# Altium PCB 电流环打样板.PcbDoc
Units mil, origin at the board's own origin, x right, y up, seen from the top; angles counter-clockwise.
Board outline 2909.03 x 1559.03 mil, 2 copper layers (Top Layer, Bottom Layer); 25 components, 16 nets, 85 pads, 21 vias.
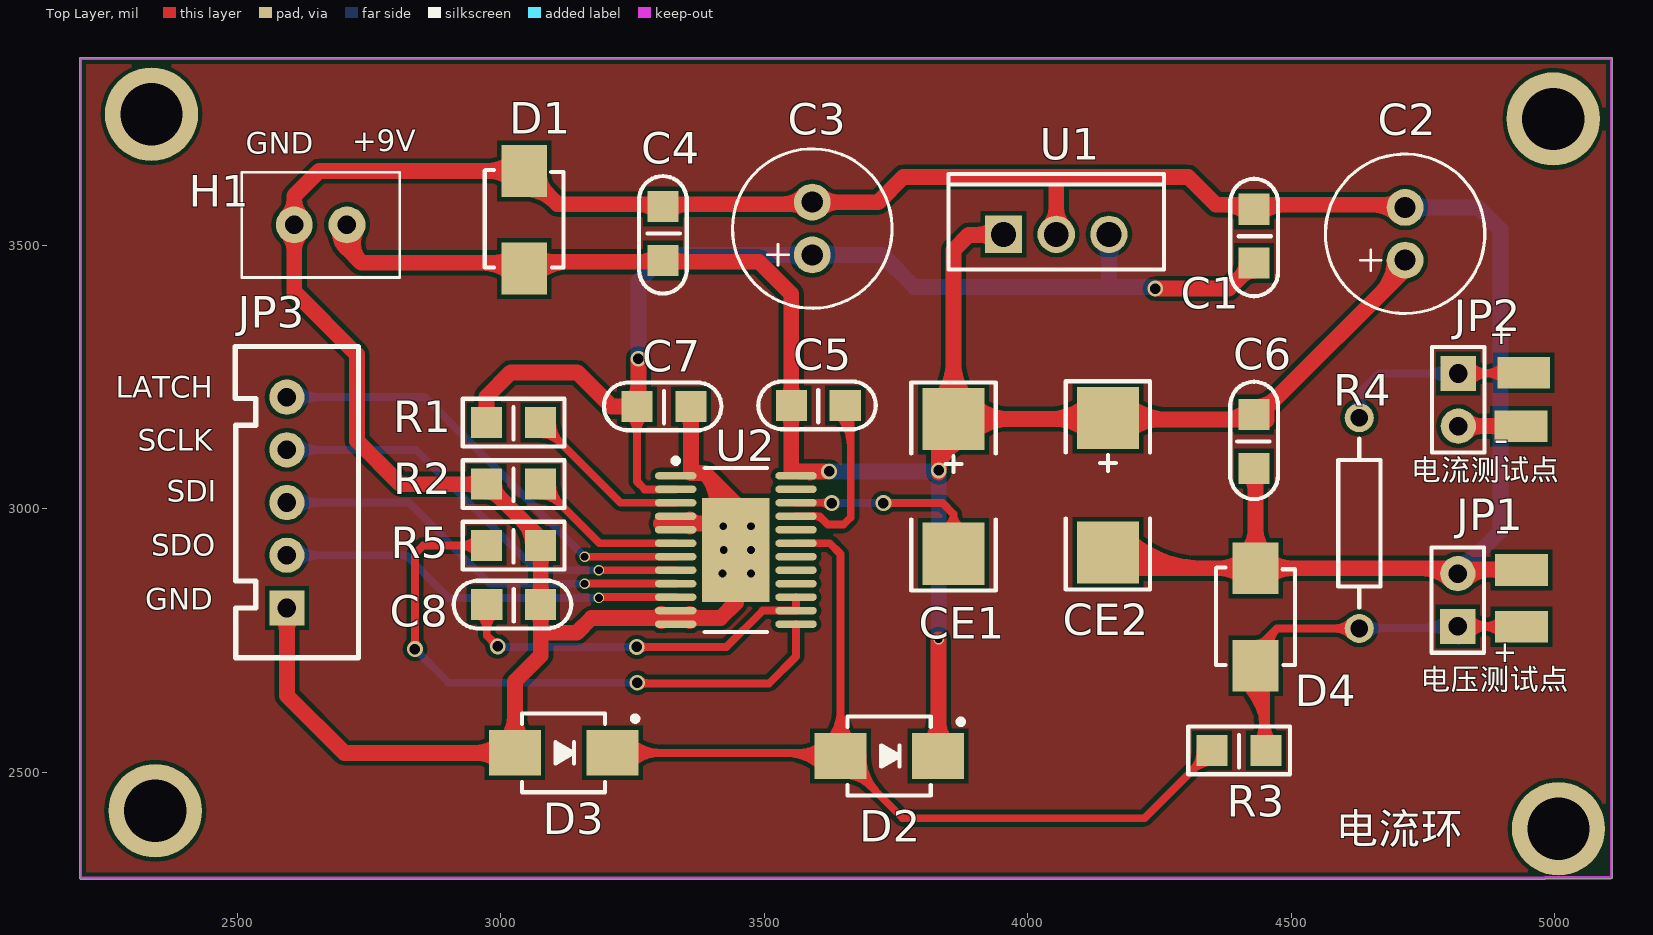
[diagram p0: Top Layer view]
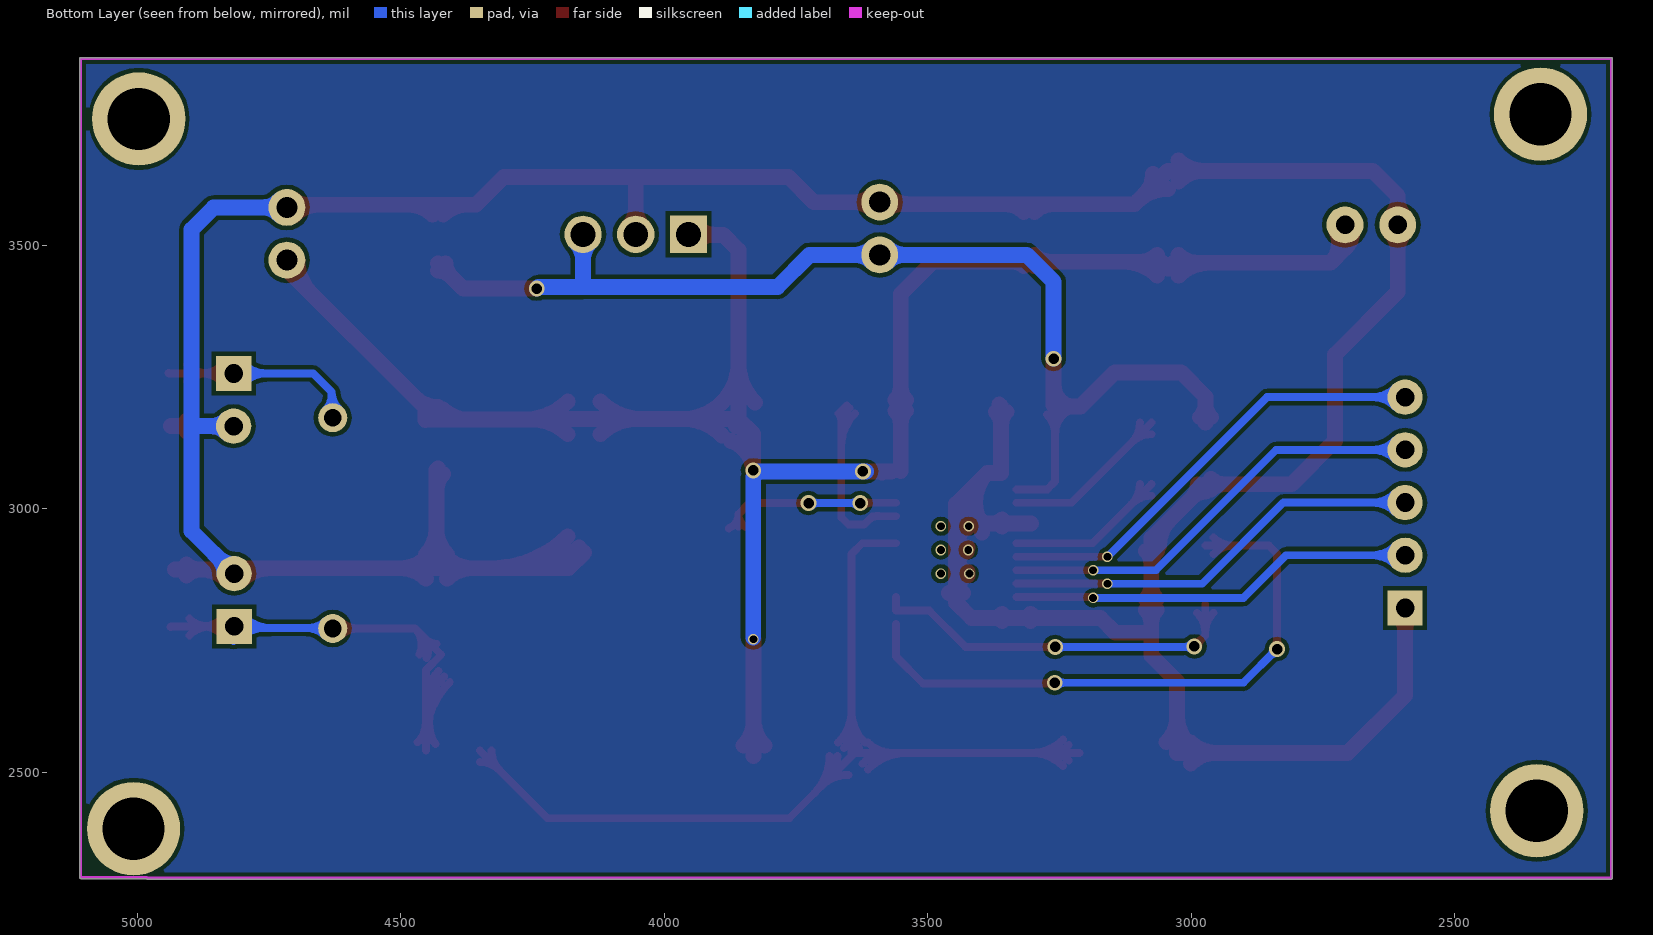
[diagram p1: Bottom Layer view, seen from below]

## Layer stack, top to bottom
Top Layer: signal copper 1.4
Dielectric: dielectric 12.6, FR-4, Dk 4.8
Bottom Layer: signal copper 1.4

## Board outline
2203,2297.49 cw(c2203,2300) 2200.49,2300 2200.49,3854 cw(c2203,3854) 2203,3856.51 5107,3856.51 cw(c5107,3854) 5109.52,3854 5109.52,2301 cw(c5107,2301) 5107,2298.49 4983.04,2298.49 4982.78,2298.22 cw(c4981,2300) 4981,2297.49

## Design rules (kind name [scope] priority, off if disabled: settings)
Clearance [All] p1: gap=8
PolygonConnect [All] p1: connectstyle=Direct reliefconductorwidth=10 reliefentries=4 polygonreliefangle="90 Angle" airgapwidth=10
RoutingVias [All] p1: holewidth=15 width=20 viastyle="Through Hole" minholewidth=5 minwidth=10 maxholewidth=20 maxwidth=30
SolderMaskExpansion [All] p1: expansion=4
Width [All] p1: maxlimit=30 minlimit=15 preferedwidth=15 minimp=50.000000 maximp=50.000000 favimp=50.000000
28 further rules are at their usual default settings.

## Components (designator, comment, footprint, x,y, rotation, side; value= is the part's Value field where it differs from the comment)
C1 "104" 0805C 4439,3517 r90 top
C2 "220UF" "220UF polar cap" 4716,3472 r90 top
C3 "220UF" "220UF polar cap" 3591,3482 r90 top
C4 "104" 0805C 3317,3522 r90 top
C5 "104" 0805C 3602,3187 r0 top
C6 "104" 0805C 4420.06,3128 r270 top
C7 "104" 0805C 3309,3185 r0 top
C8 "104" 0805C 3024,2809 r0 top
CE1 "10uF" C钽电容7mm*4mm 3859,3090 r270 top
CE2 "10uF" C钽电容7mm*4mm 4152,3092 r270 top
D1 "TVS" tvs 3047,3543 r270 top
D2 "SS38" SWB 3743,2531 r0 top
D3 "SS38" SWB 3125,2537 r0 top
D4 "TVS" tvs 4435,2789 r270 top
H1 "CH2" CH2座 2708,3539 r180 top
JP1 "HDR-1X2" HDR2.54-LI-2P 4816,2827 r90 top
JP2 "HDR-1X2" HDR2.54-LI-2P 4817,3207 r270 top
JP3 "HDR-1X5" XH2.54-LI-5P 2594,3012 r90 top
R1 "10K" 0805R 3024,3159 r0 top
R2 "1K" 0805R 3024,3042.33 r0 top
R3 "20" 0805R 4401,2537 r0 top
R4 "Res2" AXIAL-0.4 4629,2973 r90 top
R5 "15K" 0805R 3024,2925.67 r0 top
U1 "L7805CP" ISOWATT220AB 4054,3521 r0 top
U2 "AD5410" AD5410 3446,2922 r0 top

## Footprints (in the part's own frame and the unit in brackets; to place one, negate y for a bottom-side part, rotate by r counter-clockwise, add the part's x,y. Pads: shape width x height; smd on the part's side, far side on the other; paste and mask are expansions set on the pad)
"220UF polar cap" [mil]
  round 70 hole 40: 1(0,0) 2(100,0)
  silkscreen extent -101,-151 201,151
0805C [mm]
  rect 1.5x1.5 smd: 1(-1.289,0.241) 2(1.311,0.241)
  silkscreen extent -2.88,-0.91 2.78,1.39
0805R [mm]
  rect 1.5x1.5 smd: 1(-1.299,0.116) 2(1.301,0.116)
  silkscreen extent -2.45,-1.03 2.45,1.27
AD5410 [mm]
  oval 2x0.35 smd: 1(-2.9,3.575) 2(-2.9,2.925) 3(-2.9,2.275) 4(-2.9,1.625) 5(-2.9,0.975) 6(-2.9,0.325) 7(-2.9,-0.325) 8(-2.9,-0.975) 9(-2.9,-1.625) 10(-2.9,-2.275) 11(-2.9,-2.925) 12(-2.9,-3.575) 13(2.9,-3.575) 14(2.9,-2.925) 15(2.9,-2.275) 16(2.9,-1.625) 17(2.9,-0.975) 18(2.9,-0.325) 19(2.9,0.325) 20(2.9,0.975) 21(2.9,1.625) 22(2.9,2.275) 23(2.9,2.925) 24(2.9,3.575)
  rect 3.25x5.02 smd: 25(0,0)
  silkscreen extent -3.02,-3.95 1.5,4.42, body extent -2.25,-3.95 2.25,3.95, height 1.2
AXIAL-0.4 [mm] "Axial Device, Thru-Hole; 2 Leads; 0.4 in Pin Spacing"
  round 1.4 hole 0.85: 1(-5.08,0) 2(5.08,0)
  silkscreen extent -4.06,-1.02 4.06,1.02
CH2座 [mil]
  round 70 hole 35: 1(0,0) 2(100,0)
  silkscreen extent -100,-100 200,100
C钽电容7mm*4mm [mm] "E106钽电容"
  rect 3x3 smd: 1(-2.048,0) 2(4.445,0)
  silkscreen extent -3.81,-2.03 6.22,2.03
HDR2.54-LI-2P [mm] "封装库来自淘宝卖家 ID：黄晶宝石"
  rect 1.7x1.7 hole 0.9: 1(-1.27,0)
  round 1.7 hole 0.9: 2(1.27,0)
  silkscreen extent -2.54,-1.27 2.54,1.27, body extent -2.54,-1.27 2.54,1.27, height 8.5
ISOWATT220AB [mm] "TO, Thru-Hole, Vertical, Heatsink Mounted; 3 In-Line Leads; Pitch 2.54 mm; Pin sequence 1, 3, 2"
  rect 1.8x1.8 hole 1.2: 1(-2.54,0)
  round 1.8 hole 1.2: 2(2.54,0) 3(0,0)
  silkscreen extent -5.2,-1.7 5.2,2.9
SWB [mm] "7.2*3.8*2.2mm(长宽高，不包括引脚）"
  rect 2.5x2.2 smd: 1(-2.5,0) 2(2.2,0)
  silkscreen extent -2.16,-1.9 3.43,1.9, body extent -2.78,-1.8 2.52,1.8, height 2.35
tvs [mm] "4*3.0*2.2mm(长宽高，不包括引脚）"
  rect 2.5x2.2 smd: 1(-2.5,-0.071) 2(2.2,-0.071)
  silkscreen extent -2.54,-1.97 2.16,1.83
XH2.54-LI-5P [mm] "接插件，5P  淘宝ID:黄晶宝石   店铺网址:https://shop463601444.taobao.com"
  rect 1.7x1.7 hole 0.9: 1(-5.08,0)
  round 1.7 hole 0.9: 2(-2.54,0) 3(0,0) 4(2.54,0) 5(5.08,0)
  silkscreen extent -7.48,-3.45 7.52,2.49, body extent -7.58,-3.3 7.58,2.4, height 7.03

## Part data
C1 C4 C5 C6 C7 C8: library part cap, "非极性电容"
C2 C3: library part "220UF polar cap", "220UF polar cap"
CE1 CE2: library part CE, "直插电解电容"
D1 D4: library part SMAJ26CA, "瞬态抑制二极管(TVS)"
D2 D3: library part SS34, "肖特基二极管"
H1: library part CH2座, "CH2座"
JP1 JP2: library part "Header 2", "2P接插件"
JP3: library part "Header 5", "5P接插件"
R1 R2 R3 R5: library part 0805电阻, "0805电阻"
R4: "Resistor"
U1: "Positive Voltage Regulator"
U2: "电流环芯片"

## Free pads (board coordinates)
  rect 100x60 smd paste+0 mask+4: 0(4936,3157) 0(4941,3258) 1(4937,2884) 2(4937,2776)
  round 177.17 hole 118.11 paste+0 mask+4: 0(4997,3740) 1(2344,2427) 2(2337,3749) 3(5007,2393)

## Via types
v1: diameter 20, hole 15, Top Layer to Bottom Layer, 11 vias
v2: diameter 30, hole 20, Top Layer to Bottom Layer, 10 vias

## Nets (pads, with @x,y where several pads share a name; then routed paths per layer and width w, separated by ;. In a path a pad name is that pad's centre, name@x,y a point inside that pad or via, vN(x,y) a via of type N, cw(c..) or ccw(c..) an arc to the next point about the centre after c; other vN are vias at no path point)
+5V: C1.1 C3.1 C7.1 R1.1 U1.2 U2.2 | length 2689.6
  Top Layer w15: C7.1@3242.67,3178.89 cw(c3205.07,3141.29) 3258.25,3141.29 cw(c3311.43,3141.29) C7.1@3273.82,3178.89 ; C7.1 3258.25,3051.75 3272.84,3037.16 U2.2
  Top Layer w30: R1.1@2962.59,3173.85 ccw(c2937.79,3198.65) 2972.86,3198.65 ccw(c3007.93,3198.65) R1.1@2983.13,3173.85 ; R1.1 2972.86,3212.86 3019,3259 3145,3259 3209.53,3194.47 C7.1 3261,3197.22 v2(3261,3285) ; C7.1@3247.98,3184.2 ccw(c3223.18,3159.4) 3223.18,3194.47 ccw(c3223.18,3229.54) 3247.98,3204.74 ccw(c3216.53,3236.19) 3261,3236.19 ; v2(4242,3418) 4381.28,3418 C1.1 ; C1.1@4415,3466.25 cw(c4379.93,3466.25) 4404.73,3441.45 cw(c4429.53,3416.65) C1.1@4429.53,3451.72
  Bottom Layer w30: v2(3261,3285) 3261,3431 3312,3482 3724,3482 3785,3421 4154,3421 ; C3.1@3576.86,3467.86 ccw(c3542.72,3433.72) 3542.72,3482 ccw(c3542.72,3530.28) C3.1@3576.86,3496.14 ; C3.1@3605.14,3467.86 cw(c3639.28,3433.72) 3639.28,3482 cw(c3639.28,3530.28) C3.1@3605.14,3496.14 ; U1.2@4139.55,3506.55 cw(c4104.67,3471.67) 4154,3471.67 cw(c4203.33,3471.67) U1.2@4168.45,3506.55 ; U1.2 4154,3421 ; v2(4242,3418) 4239,3421 4154,3421
+9V: C2.1 C4.1 C5.1 C6.1 CE1.1 CE2.1 D1.2 D2.2 H1.1 U1.1 U2.24 | length 5417.8
  Top Layer w30: H1.1@2694.6,3524.15 cw(c2667.38,3494) 2708,3494 ; H1.1@2699.17,3543.7 ccw(c2735.21,3524.52) 2706.34,3495.66 ; H1.1 2708,3494 ; H1.1@2721.4,3524.15 ccw(c2748.62,3494) 2708,3494 ; H1.1@2725.66,3529.6 ccw(c2772.61,3504.61) 2735,3467 ; 2964.47,3467 cw(c2964.47,3382.56) D1.2@3024.18,3442.27 ; 2987.24,3467 ccw(c2987.24,3519.24) D1.2@3024.18,3482.3 ; D1.2@3064.21,3442.27 cw(c3128.75,3377.73) 3128.75,3469 ; D1.2@3064.21,3482.3 ccw(c3096.32,3514.41) 3096.32,3469 ; 3267.03,3469 ccw(c3267.03,3511.75) C4.1@3297.26,3481.52 ; 3277.88,3469 cw(c3277.88,3441.6) C4.1@3297.26,3460.98 ; C4.1@3317.8,3460.98 cw(c3337.18,3441.6) 3337.18,3469 ; C4.1@3317.8,3481.52 ccw(c3348.03,3511.75) 3348.03,3469 ; C5.1@3540.98,3186.2 cw(c3516.18,3161.4) 3551.25,3161.4 cw(c3586.32,3161.4) C5.1@3561.52,3186.2 ; C5.1@3540.98,3206.74 ccw(c3516.18,3231.54) 3551.25,3231.54 ccw(c3586.32,3231.54) C5.1@3561.52,3206.74 ; 3551.25,3071.67 C5.1 3551.25,3407.75 3490,3469 3056.82,3469 D1.2 3033.57,3467 2735,3467 ; 3568.43,3071 v2@3613,3071 ; D2.2@3809.6,2551.02 ccw(c3758.87,2601.75) 3830.62,2601.75 ; CE1.1@3827.85,3201.78 ccw(c3752.64,3276.99) 3859,3276.99 ccw(c3965.36,3276.99) 3890.15,3201.78 ccw(c3965.36,3276.99) 3965.36,3170.63 ccw(c3965.36,3064.27) CE1.1@3890.15,3139.48 ; D2.2@3830.62,2531 v1(3830.62,2752.62) ; 3830.62,2596.93 ccw(c3895.55,2596.93) D2.2@3849.64,2551.02 ; v2@3831,3069.07 cw(c3894.55,3069.07) CE1.1@3873.56,3129.04 ; v2(3831,3073) 3831,3142.62 CE1.1 ; 3831,3111.35 cw(c3879.75,3111.35) CE1.1@3863.65,3157.36 ; 3902.26,3520 ccw(c3902.26,3572.74) U1.1@3939.55,3535.45 ; 3907.08,3520 cw(c3907.08,3474.08) U1.1@3939.55,3506.55 ; U1.1@3954,3520 3888,3520 3859,3491 CE1.1 ; 4040.82,3170.63 ccw(c4040.82,3283.81) CE2.1@4120.85,3203.78 ; 4050.47,3170.63 cw(c4050.47,3071.1) CE2.1@4120.85,3141.48 ; CE2.1@4183.15,3141.48 cw(c4251.12,3073.51) 4251.12,3169.63 ; CE2.1@4183.15,3203.78 ccw(c4265.6,3286.23) 4265.6,3169.63 ; 4372.43,3169.63 ccw(c4372.43,3235.85) C6.1@4419.26,3189.02 ; C6.1@4429.53,3193.28 ccw(c4429.53,3253.03) 4471.78,3210.78 ; 4669.84,3408.84 ccw(c4606.67,3472) C2.1@4696,3472 ; C2.1 4716,3455 4453.47,3192.47 4453.47,3168.75 4452.59,3169.63 4192,3169.63 4191,3170.63 CE1.1 ; C2.1@4718,3472 C2.1@4718,3489 ; 2708,3494 2735,3467 ; U2.24@3586.92,3068.48 cw(c3593,3062.41) 3593,3071 ccw(c3593,3062.41) U2.24@3586.92,3068.48
  Bottom Layer w30: v2@3617,3071 v2(3623,3071) 3821,3071 3831,3061 v1@3831,2756
GND: C1.2 C2.2 C3.2 C4.2 C6.2 C7.2 C8.2 CE2.2 D1.1 D3.1 D4.1 H1.2 JP1.2 JP2.2 JP3.1 pad.0@4936,3157 pad.1@4937,2884 R2.1 R5.2 U1.3 U2.1 U2.4 U2.5 U2.11 U2.12 U2.25 | length 10768.8
  Top Layer w30: JP3.1@2580.94,2798.94 cw(c2549.42,2767.42) 2594,2767.42 cw(c2638.58,2767.42) JP3.1@2607.06,2798.94 ; H1.2@2593.86,3524.86 cw(c2559.72,3490.72) 2608,3490.72 cw(c2656.28,3490.72) H1.2@2622.14,3524.86 ; H1.2@2593.86,3553.14 ccw(c2559.72,3587.28) 2608,3587.28 ccw(c2656.28,3587.28) H1.2@2622.14,3553.14 ; JP3.1 2594,2646 2703,2537 D3.1 3026.58,2672.58 3075.61,2721.61 3075.61,2765 ; R2.1@2962.59,3036.64 ccw(c2937.79,3011.84) 2937.79,3046.91 ccw(c2937.79,3081.98) R2.1@2962.59,3057.18 ; R2.1@2972.86,3032.38 cw(c2972.86,2997.31) 2997.66,3022.11 cw(c3022.46,3046.91) R2.1@2987.39,3046.91 ; D3.1@3000.66,2516.98 ccw(c2952.34,2468.66) 2952.34,2537 ccw(c2952.34,2605.34) D3.1@3000.66,2557.02 ; D3.1@3006.56,2557.02 ccw(c2958.24,2605.34) 3026.58,2605.34 ccw(c3094.92,2605.34) D3.1@3046.6,2557.02 ; D1.1@3024.18,3621.4 ccw(c2975.86,3573.08) 2975.86,3641.42 ccw(c2975.86,3709.76) D1.1@3024.18,3661.44 ; 3040.31,2979.46 cw(c2991.09,2930.24) R5.2@3060.7,2930.24 ; D1.1@3044.19,3607.21 cw(c3044.19,3524.61) 3102.6,3583.01 ; R5.2@3064.95,2919.97 cw(c3039.22,2894.24) 3075.61,2894.24 ; C8.2@3065.34,2808.2 cw(c3040.54,2783.4) 3075.61,2783.4 cw(c3110.68,2783.4) C8.2@3085.88,2808.2 ; C8.2@3065.34,2828.74 ccw(c3040.54,2853.54) 3075.61,2853.54 ccw(c3110.68,2853.54) C8.2@3085.88,2828.74 ; D1.1@3072.5,3635.51 ccw(c3126.58,3635.51) 3088.34,3597.27 ; 3075.61,2896.1 cw(c3109.36,2896.1) R5.2@3085.5,2919.97 ; 3261.86,3578 cw(c3261.86,3527.94) C4.2@3297.26,3563.34 ; 3285.51,2793 ccw(c3285.51,2820.68) U2.11@3305.08,2801.11 ; 3290.56,2793 cw(c3290.56,2772.47) U2.12@3305.08,2786.99 ; 3304,2972 3380,2972 ; C4.2@3317.8,3563.34 cw(c3353.2,3527.94) 3353.2,3578 ; C7.2@3350.34,3184.2 cw(c3325.54,3159.4) 3360.61,3159.4 cw(c3395.68,3159.4) C7.2@3370.88,3184.2 ; U2.12@3358.57,2786.99 cw(c3373.09,2772.47) 3373.09,2793 ; U2.11@3358.57,2801.11 ccw(c3378.15,2820.68) 3378.15,2793 ; U2.5@3358.57,2966.12 cw(c3372.77,2951.93) 3372.77,2972 ; U2.4@3358.57,2980.24 ccw(c3378.47,3000.14) 3378.47,2972 ; C7.2@3364,3197.86 C7.2 3360.61,3068 3387,3068 ; U2.25@3397.04,2955.44 ccw(c3380,2954.95) 3380,2972 ; U2.25@3401.99,2978.33 ccw(c3331.67,3012.66) 3387,3068 ; U2.25@3406.25,2985.45 cw(c3380,3004.33) 3380,2972 ; 3416.73,3038.27 cw(c3371.62,2993.16) U2.25@3428.95,2965.17 ; U2.25@3424.2,2926.85 cw(c3417.31,2899) U2.25@3446,2899 ; U2.25@3424.35,2873.29 ccw(c3380.38,2922) U2.25 ; U2.25@3424.54,2880.54 cw(c3372.72,2828.72) U2.25@3446,2828.72 ; U2.25@3425.3,2963.24 ccw(c3385.08,3009) U2.25@3446,3009 ; U2.25@3425.54,2970.54 cw(c3376.13,2921.13) U2.25@3446,2921.13 ; U2.25@3426.54,2918.46 ccw(c3379.54,2965.46) U2.25@3446,2965.46 ; U2.25@3426.54,2925.54 cw(c3379.54,2878.54) U2.25@3446,2878.54 ; U2.25@3432.39,2840.11 cw(c3427.15,2822) 3446,2822 ; U2.25@3459.61,2840.11 ccw(c3464.85,2822) 3446,2822 ; 3533.06,3578 ccw(c3533.06,3639.94) C3.2@3576.86,3596.14 ; 3552.37,3578 cw(c3552.37,3543.37) C3.2@3576.86,3567.86 ; C3.2 3716,3582 3764,3630 4054,3630 ; C3.2@3595,3568 3585,3578 3107.61,3578 D1.1 2655.42,3641.42 2608,3594 H1.2 2608,3411.77 2727,3292.77 2727,3129 2809.09,3046.91 R2.1 3075.22,2944.55 R5.2 3075.61,2929.86 C8.2 3075.61,2765 ; C3.2@3605.14,3567.86 cw(c3639.28,3533.72) 3639.28,3582 cw(c3639.28,3630.28) C3.2@3605.14,3596.14 ; U1.3@4039.55,3535.45 ccw(c4004.67,3570.33) 4054,3570.33 ccw(c4103.33,3570.33) U1.3@4068.45,3535.45 ; U1.3 4054,3630 ; CE2.2 4181.58,2887.42 D4.1 ; CE2.2@4161.94,2926.94 ccw(c4257.35,3022.35) 4257.35,2887.42 ; CE2.2@4183.15,2948.15 ccw(c4329.77,3094.77) 4329.77,2887.42 ; 4374.2,3577 cw(c4374.2,3513.28) C1.2@4419.26,3558.34 ; D4.1@4412.18,2867.4 ccw(c4363.86,2819.08) 4363.86,2887.42 ccw(c4363.86,2955.76) D4.1@4412.18,2907.44 ; D4.1@4412.18,2913.34 ccw(c4363.86,2961.66) 4432.19,2961.66 ccw(c4500.53,2961.66) D4.1@4452.21,2913.34 ; C6.2@4419.26,3066.12 cw(c4388.02,3034.88) 4432.19,3034.88 ; C6.2 4432.19,3073.73 D4.1 ; C1.2@4439.8,3558.34 cw(c4484.86,3513.28) 4484.86,3577 ; D4.1@4452.21,2867.4 cw(c4500.53,2819.08) 4500.53,2887.42 cw(c4500.53,2955.76) D4.1@4452.21,2907.44 ; D4.1@4453.47,2896.69 D4.1@4444.19,2887.42 ; 4655.64,3577 cw(c4655.64,3511.64) C2.2@4701.86,3557.86 ; 4679.79,3577 ccw(c4679.79,3608.21) C2.2@4701.86,3586.14 ; C2.2@4718,3589 4706,3577 4357,3577 4304,3630 4054,3630 ; 4746.27,2887.42 cw(c4746.27,2807.27) JP1.2@4802.94,2863.94 ; JP2.2 pad.0@4936,3157 ; JP1.2@4829.06,2863.94 cw(c4879.89,2813.11) 4879.89,2885 ; JP2.2@4830.06,3143.94 cw(c4861.58,3112.42) 4861.58,3157 cw(c4861.58,3201.58) JP2.2@4830.06,3170.06 ; 4878.37,2885 cw(c4878.37,2845.37) pad.1@4906.39,2873.39 ; 4883.2,2885 ccw(c4883.2,2917.8) pad.1@4906.39,2894.61 ; pad.0@4905.39,3146.39 ccw(c4879.79,3120.79) 4879.79,3157 ccw(c4879.79,3193.21) pad.0@4905.39,3167.61 ; pad.1@4929,2885 4815,2885 4805.58,2887.42 D4.1@4444.19,2887.42 ; 3075.61,2765 3144,2765 3172,2793 3417,2793 3446,2822 ; 3387,3068 U2.25@3446,3009 ; 3446,2822 U2.25 ; U2.25 U2.25@3446,3009 ; D4.1 D4.1@4444.19,2887.42
  Bottom Layer w30: C3.2 3609,3582 C3.2@3595,3568 ; C2.2 4855,3572 4897,3530 4897,3167 ; C2.2@4730.14,3557.86 cw(c4764.28,3523.72) 4764.28,3572 cw(c4764.28,3620.28) C2.2@4730.14,3586.14 ; JP1.2 4897,2958 4897,3167 ; JP1.2@4816,2895.46 ccw(c4816,2940.04) 4847.52,2908.52 ccw(c4879.04,2877) JP1.2@4834.46,2877 ; JP2.2 4887,3157 4897,3167 ; JP2.2@4830.06,3143.94 cw(c4861.58,3112.42) 4861.58,3157 cw(c4861.58,3201.58) JP2.2@4830.06,3170.06
  other v1: 3421,2877 3475,2877 3423,2922 3475,2922 3422,2967 3475,2967
NetC5_2: C5.2 U2.21 | length 480
  Top Layer w15: U2.21 3605.02,2985.98 3621,2970 3650,2970 3664,2984 3664,3186.08 C5.2 ; U2.21@3592.65,2986.59 cw(c3592.65,2958.2) 3612.73,2978.27 ; C5.2@3638.03,3180.89 cw(c3575.35,3118.21) 3664,3118.21 ; C5.2@3648.64,3191.5 cw(c3611.56,3154.42) 3664,3154.42 ; C5.2@3664,3168.37 cw(c3681.71,3168.37) C5.2@3669.19,3180.89
NetC8_1: C8.1 U2.14 U2.15 | length 906.1
  Top Layer w15: C8.1@2957.67,2802.89 cw(c2920.07,2765.29) 2973.25,2765.29 cw(c3026.43,2765.29) C8.1@2988.82,2802.89 ; C8.1 2973.25,2759.75 v2(2994,2739) ; v2@2986.5,2739 ccw(c2968.39,2739) 2981.2,2751.8 ccw(c2994,2764.61) v2@2994,2746.5 ; v2(3258,2738) 3428,2738 3496.84,2806.84 U2.14 U2.15 ; v2@3263.3,2732.7 cw(c3276.11,2719.89) 3276.11,2738 cw(c3276.11,2756.11) v2@3263.3,2743.3
  Bottom Layer w15: v2(2994,2739) 2995,2738 v2(3258,2738) ; v2@2999.3,2733.7 cw(c3009.69,2723.31) 3009.69,2738 ; v2@2999.3,2744.3 ccw(c3014.52,2759.52) 3014.52,2738 ; v2@3252.7,2732.7 ccw(c3239.89,2719.89) 3239.89,2738 ccw(c3239.89,2756.11) v2@3252.7,2743.3
NetCE1_2: CE1.2 U2.22 | length 509.2
  Top Layer w15: U2.22 v2@3622.57,3011.57 ; 3608.52,3011.57 cw(c3608.52,2991.52) v2@3622.7,3005.7 ; 3611.26,3011.57 ccw(c3611.26,3027.74) v2@3622.7,3016.3 ; v2(3726,3011) 3838,3011 3859,2990 ; v2@3731.3,3005.7 cw(c3744.11,2992.89) 3744.11,3011 cw(c3744.11,3029.11) v2@3731.3,3016.3 ; CE1.2@3840.53,2963.13 ccw(c3830.23,2990) 3859,2990 ; CE1.2@3859,2966 3859,2990 ; CE1.2@3877.47,2963.13 cw(c3887.77,2990) 3859,2990
  Bottom Layer w15: v2(3628,3011) v2(3726,3011) ; v2@3633.3,3005.7 cw(c3646.11,2992.89) 3646.11,3011 cw(c3646.11,3029.11) v2@3633.3,3016.3 ; v2@3720.7,3005.7 ccw(c3707.89,2992.89) 3707.89,3011 ccw(c3707.89,3029.11) v2@3720.7,3016.3
NetD2_1: D2.1 D3.2 R3.1 U2.19 | length 2609.8
  Top Layer w15: D3.2 3638.58,2537 D2.1 ; D3.2@3232.24,2522.29 cw(c3267.76,2486.77) 3267.76,2537 cw(c3267.76,2587.23) D3.2@3232.24,2551.71 ; D3.2@3242.85,2511.68 cw(c3303.97,2450.55) 3303.97,2537 cw(c3303.97,2623.45) D3.2@3242.85,2562.32 ; 3537.74,2537 cw(c3537.74,2430.07) D2.1@3613.36,2505.68 ; U2.19 3624.2,2934.8 3644.58,2914.42 D2.1 ; 3566.71,2537 ccw(c3566.71,2602.96) D2.1@3613.36,2556.32 ; 3573.96,2537 cw(c3573.96,2466.28) D2.1@3623.96,2516.29 ; D2.1@3619.26,2556.32 ccw(c3558.14,2617.45) 3644.58,2617.45 ccw(c3731.03,2617.45) D2.1@3669.9,2556.32 ; D2.1@3629.87,2545.71 ccw(c3594.35,2581.23) 3644.58,2581.23 ccw(c3694.81,2581.23) D2.1@3659.29,2545.71 ; D2.1@3650.49,2495.19 cw(c3650.49,2423) 3701.53,2474.05 ; D2.1@3671.29,2531 ccw(c3735.78,2531) 3690.18,2485.4 ; D2.1@3686.29,2531 ccw(c3787,2531) 3715.79,2459.79 ; R3.1@4327.83,2541.58 cw(c4274.66,2541.58) 4312.26,2503.97 cw(c4349.86,2466.37) R3.1@4349.86,2519.55 ; R3.1 4221.28,2413 3762.58,2413 D2.1
NetD4_2: D4.2 JP1.1 pad.2@4937,2776 R3.2 R4.1 | length 1785.7
  Top Layer w15: D4.2@4406.88,2671.15 cw(c4297.39,2561.67) R3.2@4452.22,2561.67 ; D4.2@4417.48,2681.76 cw(c4333.61,2597.89) 4452.22,2597.89 ; D4.2@4428.09,2692.37 cw(c4369.82,2634.1) 4452.22,2634.1 ; D4.2@4432.19,2744.09 ccw(c4432.19,2772.82) 4452.5,2752.5 ; R3.2@4434.15,2554.17 ccw(c4380.63,2591.48) 4444.85,2602.95 ; R3.2@4436.65,2557.15 ccw(c4399.04,2594.76) 4452.22,2594.76 ccw(c4505.4,2594.76) R3.2@4467.8,2557.15 ; 4447.85,2586.15 ccw(c4488.33,2593.38) R3.2@4464.82,2559.65 ; D4.2@4450.98,2717.24 cw(c4483.32,2732.65) 4457.99,2757.99 ; R3.2 4452.22,2694.35 4423.29,2723.29 4473,2773 ; D4.2@4464.52,2723.69 cw(c4503.65,2742.34) 4473,2773 ; R4.1@4614.82,2758.82 ccw(c4580.57,2724.57) 4580.57,2773 ccw(c4580.57,2821.43) R4.1@4614.82,2787.18 ; R4.1@4631,2754 4612,2773 4473,2773 ; JP1.1 4936,2777 pad.2@4937,2776 ; JP1.1@4834.36,2758.64 cw(c4878.68,2714.32) 4878.68,2777 cw(c4878.68,2839.68) JP1.1@4834.36,2795.36 ; 4860.27,2777 cw(c4860.27,2719.27) pad.2@4901.09,2760.09 ; 4865.09,2777 ccw(c4865.09,2827.91) pad.2@4901.09,2791.91
  Bottom Layer w15: R4.1@4631,2754 4651,2774 4792,2774 JP1.1@4817,2749 ; R4.1@4643.18,2758.82 cw(c4679.84,2722.16) 4679.84,2774 ; R4.1@4643.18,2787.18 ccw(c4675.01,2819.01) 4675.01,2774 ; 4746.07,2774 ccw(c4746.07,2846.93) JP1.1@4797.64,2795.36 ; 4760.56,2774 cw(c4760.56,2721.56) JP1.1@4797.64,2758.64 ; 4782.29,2774 ccw(c4782.29,2810.71) JP1.1@4808.25,2784.75
NetJP2_1: JP2.1 pad.0@4941,3258 R4.2 | length 746.2
  Top Layer w15: JP2.1 4940,3257 pad.0@4941,3258 ; JP2.1@4835.36,3238.64 cw(c4879.68,3194.32) 4879.68,3257 cw(c4879.68,3319.68) JP2.1@4835.36,3275.36 ; 4864.27,3257 ccw(c4864.27,3314.73) pad.0@4905.09,3273.91 ; 4869.09,3257 cw(c4869.09,3206.09) pad.0@4905.09,3242.09
  Bottom Layer w15: R4.2@4615.7,3188.02 ccw(c4585.61,3222) 4631,3222 ; R4.2@4631,3154 4631,3222 ; 4631,3216.6 ccw(c4672.6,3216.6) R4.2@4643.18,3187.18 ; JP2.1@4798.64,3238.64 ccw(c4754.32,3194.32) 4754.32,3257 ccw(c4754.32,3319.68) JP2.1@4798.64,3275.36 ; JP2.1 4666,3257 4631,3222
NetJP3_2: JP3.2 U2.10 | length 869.8
  Top Layer w15: v1@3186,2832.43 U2.10
  Bottom Layer w15: JP3.2 2820,2912 2901,2831 v1(3186,2831) ; JP3.2@2612.36,2893.64 cw(c2656.68,2849.32) 2656.68,2912 cw(c2656.68,2974.68) JP3.2@2612.36,2930.36
NetJP3_3: JP3.3 U2.9 | length 900.1
  Top Layer w15: v1(3159,2858) U2.9
  Bottom Layer w15: JP3.3 2825,3012 2979,2858 v1(3159,2858) ; JP3.3@2612.36,2993.64 cw(c2656.68,2949.32) 2656.68,3012 cw(c2656.68,3074.68) JP3.3@2612.36,3030.36
NetJP3_4: JP3.4 U2.8 | length 930.9
  Top Layer w15: v1(3186,2883.61) U2.8
  Bottom Layer w15: JP3.4 2838.61,3112 3067,2883.61 v1(3186,2883.61) ; JP3.4@2612.36,3093.64 cw(c2656.68,3049.32) 2656.68,3112 cw(c2656.68,3174.68) JP3.4@2612.36,3130.36
NetJP3_5: JP3.5 U2.7 | length 962.8
  Top Layer w15: v1@3158,2910 v1(3158.8,2909.2) U2.7
  Bottom Layer w15: JP3.5 2856,3212 v1(3158.8,2909.2) ; JP3.5@2612.36,3193.64 cw(c2656.68,3149.32) 2656.68,3212 cw(c2656.68,3274.68) JP3.5@2612.36,3230.36
NetR1_2: R1.2 U2.3 | length 403.1
  Top Layer w15: R1.2@3075.22,3141.55 cw(c3075.22,3088.37) 3112.83,3125.97 cw(c3150.43,3163.58) R1.2@3097.25,3163.58 ; R1.2 3227.23,3011.57 U2.3
NetR2_2: R2.2 U2.6 | length 386.6
  Top Layer w15: R2.2@3075.22,3024.88 cw(c3075.22,2971.7) 3112.83,3009.31 cw(c3150.43,3046.91) R2.2@3097.25,3046.91 ; R2.2 3187.34,2934.8 U2.6
NetR5_1: R5.1 U2.13 | length 1352.5
  Top Layer w15: v2@2831.7,2739.3 ccw(c2818.89,2752.11) 2837,2752.11 ccw(c2855.11,2752.11) v2@2842.3,2739.3 ; v2(2837,2734) 2837,2915 2852.24,2930.24 R5.1 ; R5.1@2957.29,2914.67 ccw(c2919.68,2877.07) 2919.68,2930.24 ccw(c2919.68,2983.42) R5.1@2957.29,2945.82 ; v2@3259,2669 3509.17,2669 3560.17,2720 U2.13 ; v2@3264.3,2664.7 cw(c3274.69,2654.31) 3274.69,2669 ; v2@3264.3,2675.3 ccw(c3279.52,2690.52) 3279.52,2669
  Bottom Layer w15: v2@2837,2726.5 cw(c2837,2708.39) 2849.8,2721.2 cw(c2862.61,2734) v2@2844.5,2734 ; v2(2837,2734) 2901,2670 v2(3259,2670) ; v2@3253.7,2664.7 ccw(c3240.89,2651.89) 3240.89,2670 ccw(c3240.89,2688.11) v2@3253.7,2675.3
pads on no net: U2.16 U2.17 U2.18 U2.20 U2.23

## Polygon pours and split planes (outlines as drawn)
no net on Top Layer "Bottom Layer-No Net 2" (solid, pour order 2): 2203,3854 5107,3854 5107,2301 5104,2304 2203,2304
no net on Bottom Layer "Bottom Layer-No Net 2" (solid, pour order 4): 2203,3854 5107,3854 5107,2301 5102,2306 2203,2306

## Keep-outs
Keep-Out Layer:
  lines w5: 2203,2300 4981,2300 4982,2301 5107,2301 5107,3854 4981,3854 2203,3854 2203,2300

## Silkscreen, mask and mechanical layers (free items; w line width, h text height)
Top Overlay:
  text "+9V" at 2718,3664 h70
  text "GND" at 2516,3660 h70
  text "+" at 4876,3298 h70
  text "LATCH" at 2269,3197 h70
  text "SCLK" at 2311,3096 h70
  text "-" at 4884,3087 h100
  text "电流测试点" at 4729,3040 h70
  text "SDI" at 2366,2999 h70
  text "-" at 4887,2915 h100
  text "SDO" at 2337,2897 h70
  text "GND" at 2325,2794 h70
  text "+" at 4882,2695 h70
  text "电压测试点" at 4747,2643 h70
  text "电流环" at 4586,2346 h100